# Altium PCB ACDC.PcbDoc (part 1 of 2)
Units mil, origin at the board's own origin, x right, y up, seen from the top; angles counter-clockwise.
Board outline 4750 x 3250 mil, 4 copper layers (Top Layer, Layer 1, Layer 2, Bottom Layer), stack 23.756 mil thick; 82 components, 68 nets, 464 pads, 343 vias.
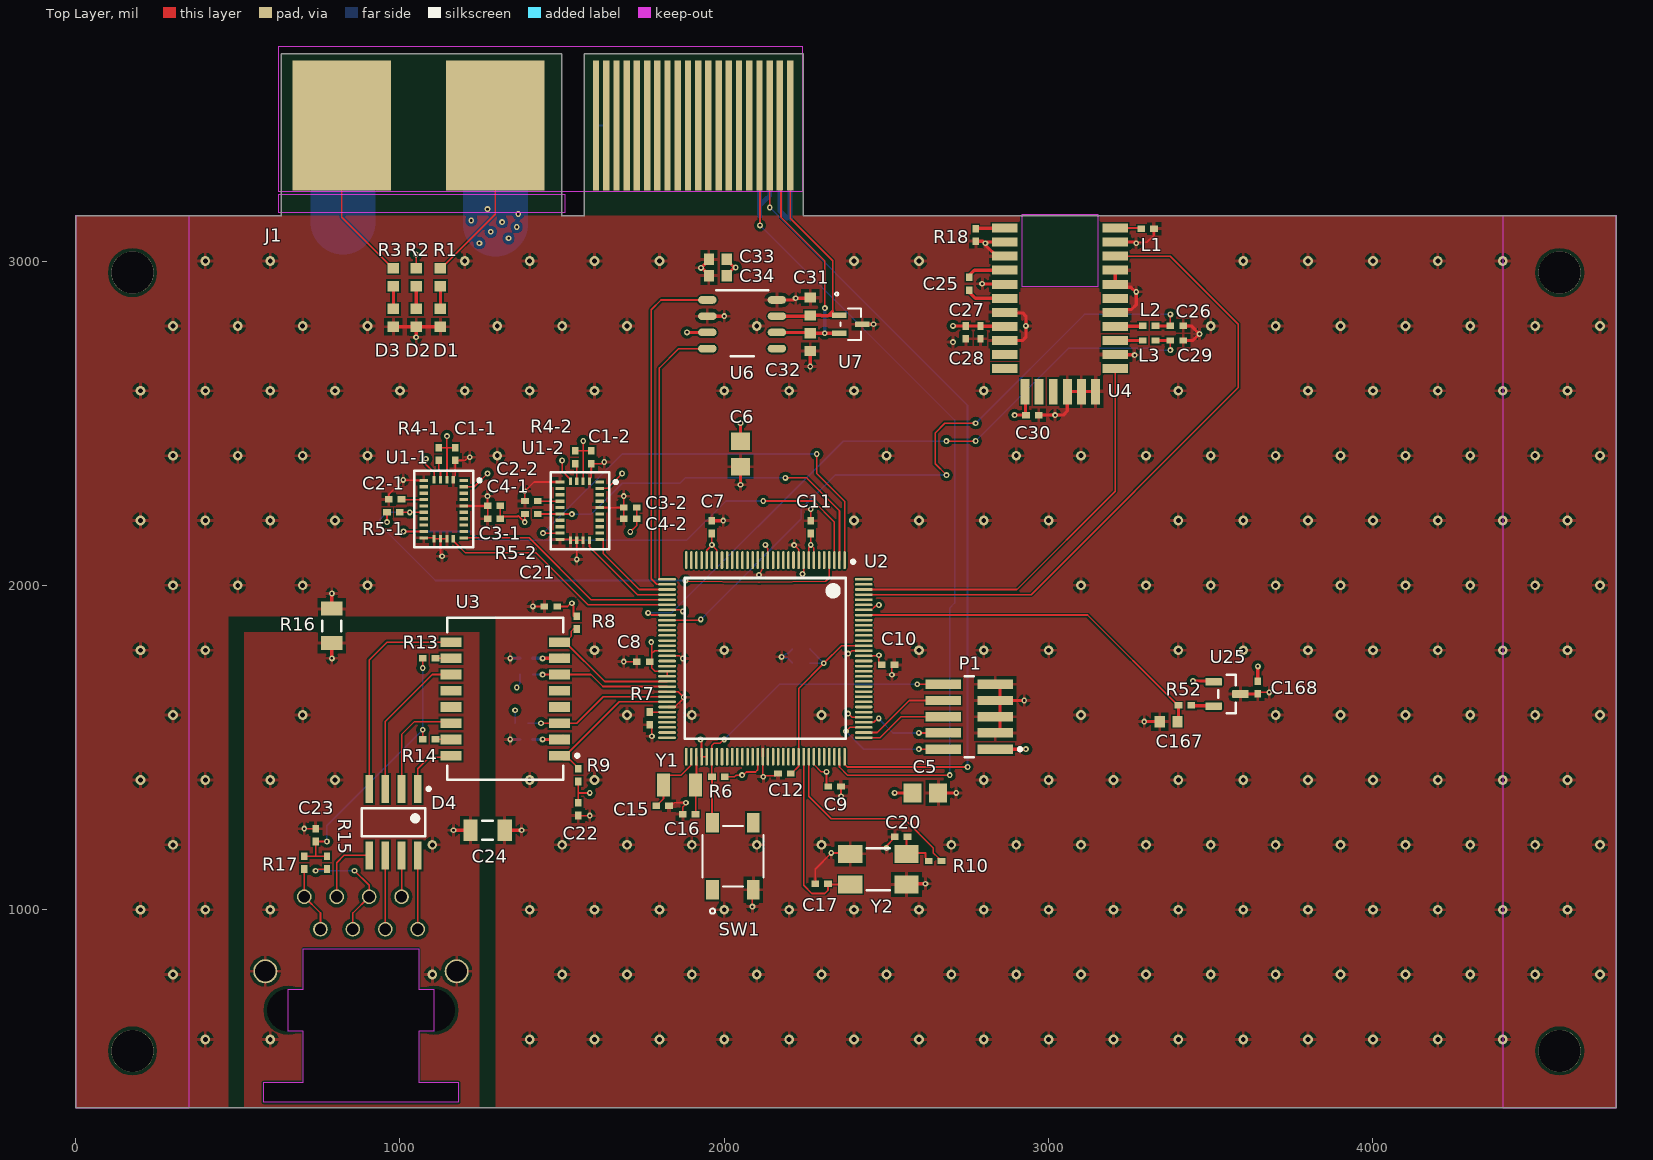
[diagram p0: Top Layer view]
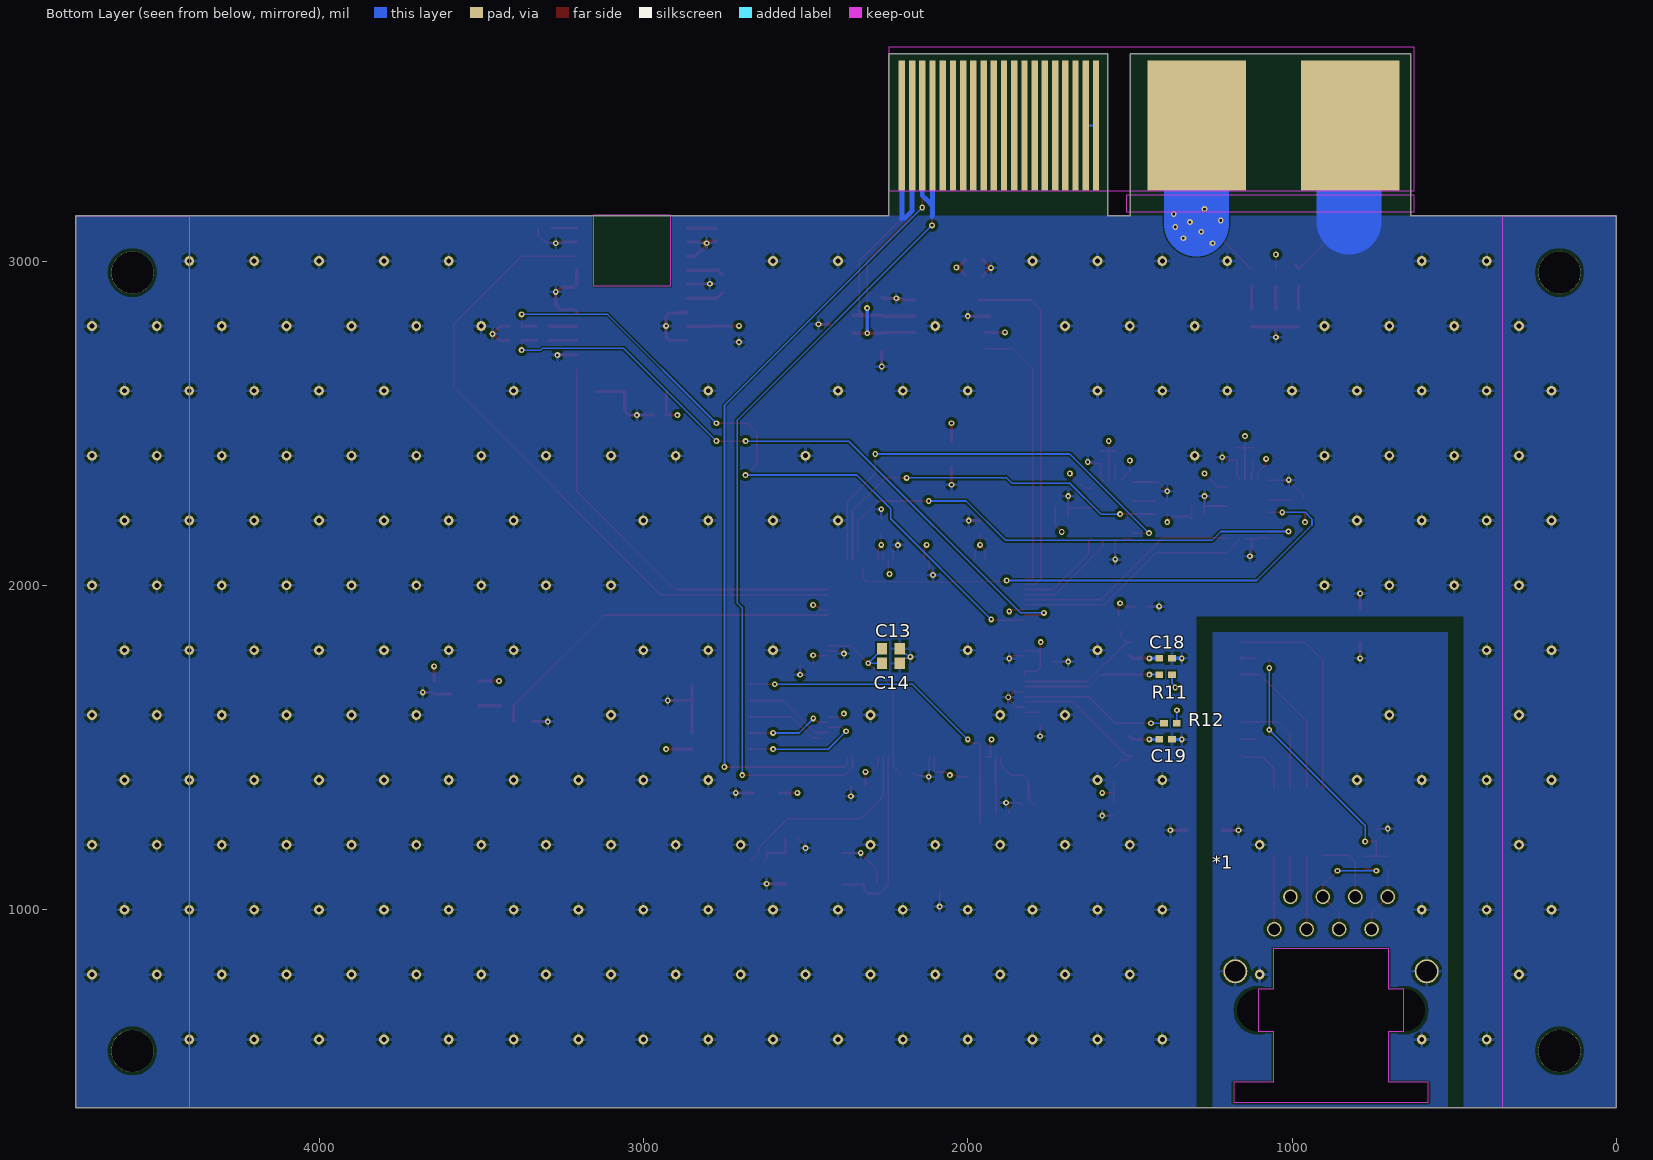
[diagram p1: Bottom Layer view, seen from below]
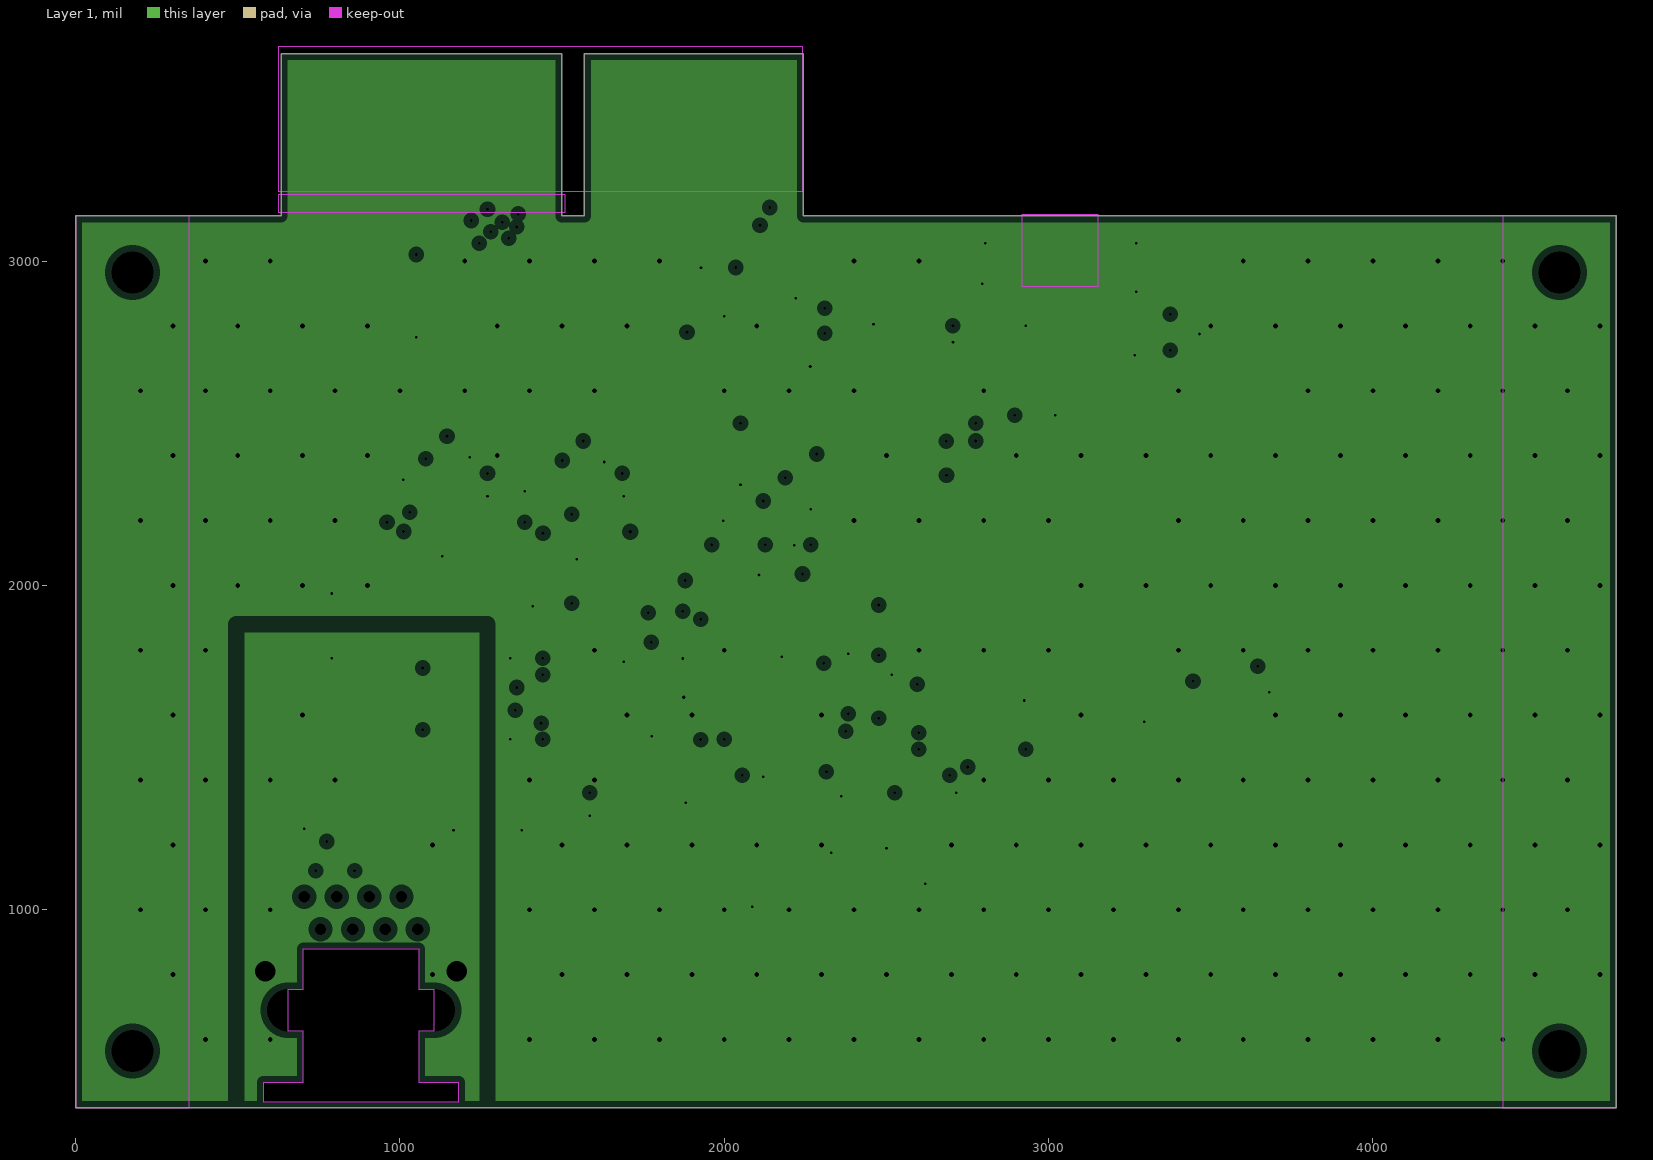
[diagram p2: Layer 1, clearances drawn from the general rule]
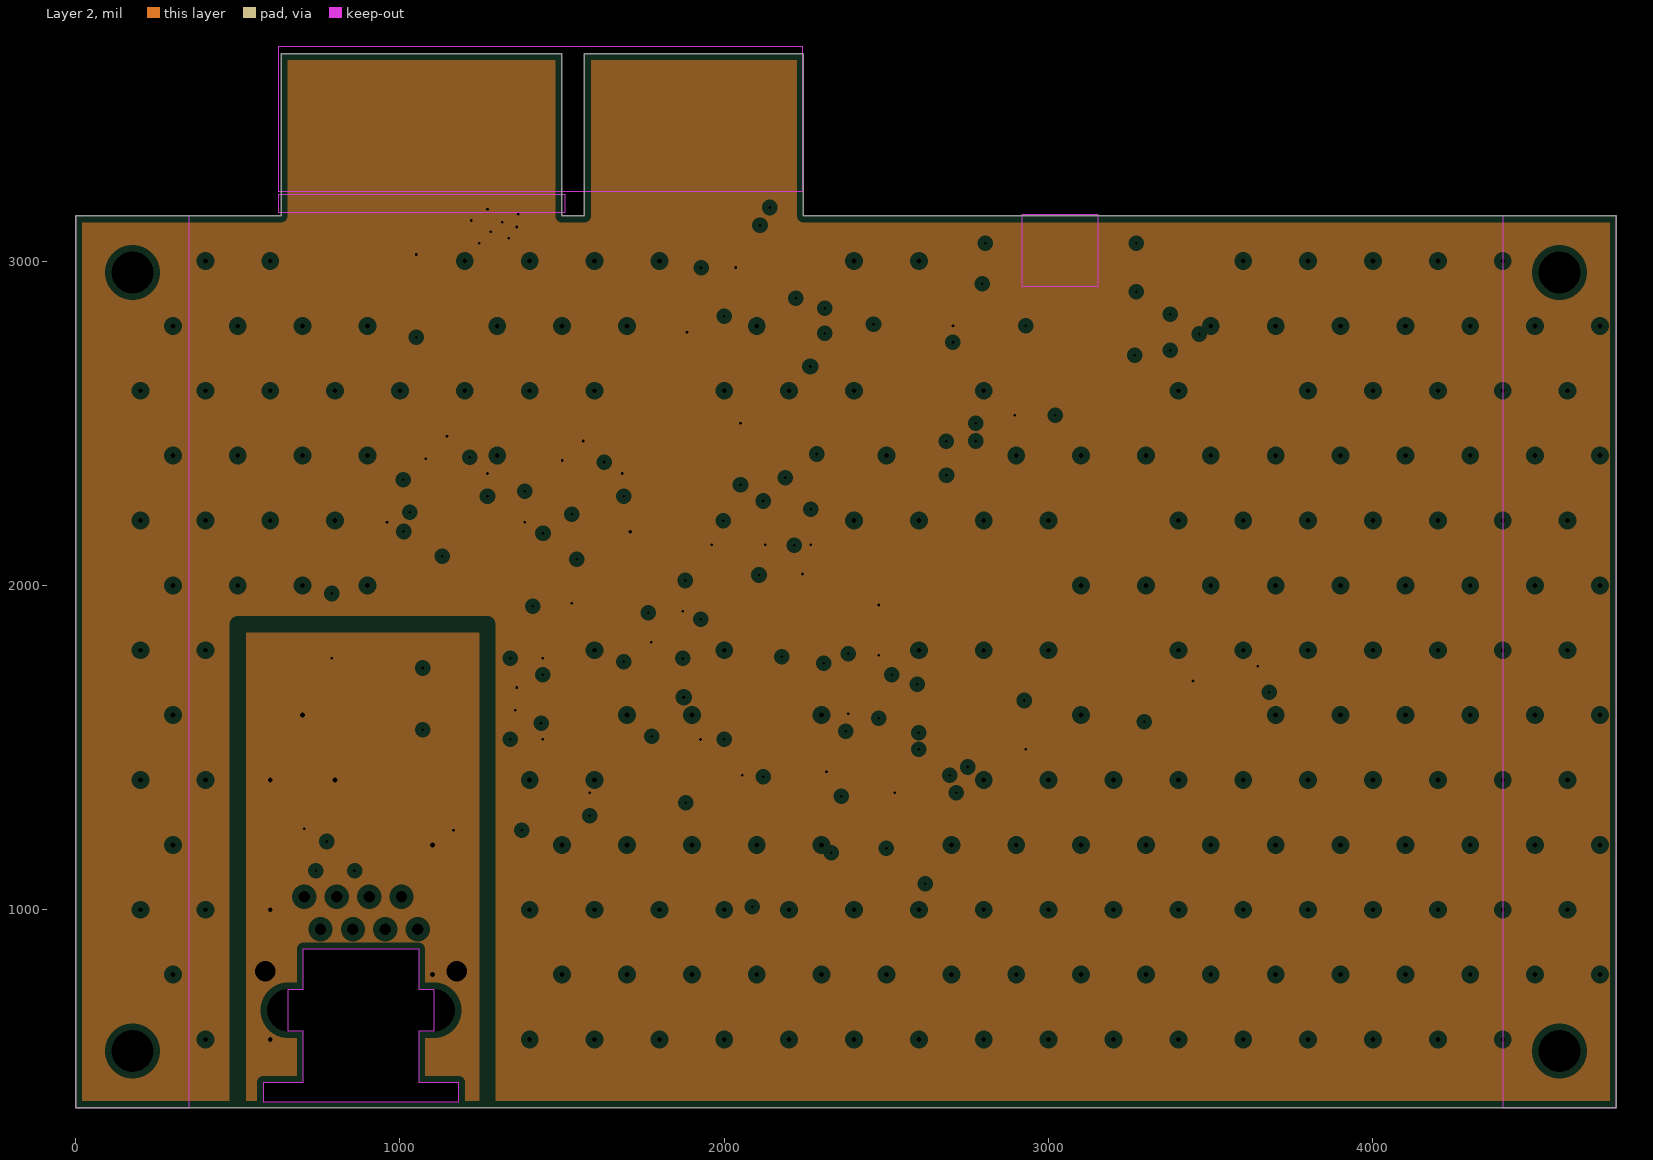
[diagram p3: Layer 2, clearances drawn from the general rule]

## Layer stack, top to bottom
Top Solder: solder mask 0.4, Solder Resist, Dk 3.5
Top Layer: signal copper 1.4
Dielectric 2: prepreg 2.8, PP-006, Dk 4.1
Layer 1: plane copper 1.378, net GND
Dielectric 1: dielectric 12.6, FR-4, Dk 4.8
Layer 2: plane copper 1.378, net 3V3
Dielectric 3: prepreg 2.8, PP-006, Dk 4.1
Bottom Layer: signal copper 1.4
Bottom Solder: solder mask 0.4, Solder Resist, Dk 3.5

## Board outline
0.5,389.5 0.5,3139.5 633.87,3139.5 633.87,3639.5 1498.87,3639.5 1498.87,3139.5 1568.87,3139.5 1568.87,3639.5 2243.86,3639.5 2243.86,3139.5 4750.5,3139.5 4750.5,389.5

## Design rules (kind name [scope] priority, off if disabled: settings)
Clearance [All] p1: gap=5 ignorepadtopadclearanceinfootprint=FALSE except(0: Arc-Text Arc-Hole Track-Text Track-Hole SMDPad-Hole THPad-Hole Via-Text Via-Hole Fill-Text Fill-Hole Poly-Text Poly-Hole Region-Text Region-Hole Text-Hole; 6: SMDPad-Text THPad-Text Text-Text; 10: Arc-Via Track-Via SMDPad-Via THPad-Via THPad-Fill THPad-Poly THPad-Region Via-Via Via-Fill Via-Poly Via-Region)
DiffPairsRouting [All] p1: maxlimit=10 minlimit=10 mostfreqgap=10 substack1={5B3CBE88-527F-45CC-934D-B3D730501180} toplayer_{5b3cbe88-527f-45cc-934d-b3d730501180}_minwidth=15 toplayer_{5b3cbe88-527f-45cc-934d-b3d730501180}_maxwidth=15 toplayer_{5b3cbe88-527f-45cc-934d-b3d730501180}_prefwidth=15 bottomlayer_{5b3cbe88-527f-45cc-934d-b3d730501180}_minwidth=15 bottomlayer_{5b3cbe88-527f-45cc-934d-b3d730501180}_maxwidth=15 bottomlayer_{5b3cbe88-527f-45cc-934d-b3d730501180}_prefwidth=15 toplayer_minwidth=15 toplayer_maxwidth=15 toplayer_prefwidth=15 bottomlayer_minwidth=15 bottomlayer_maxwidth=15 bottomlayer_prefwidth=15 substack2={8099F0E5-E8A4-4C0B-B981-DA392BF8B1DC} toplayer_{8099f0e5-e8a4-4c0b-b981-da392bf8b1dc}_minwidth=15 toplayer_{8099f0e5-e8a4-4c0b-b981-da392bf8b1dc}_maxwidth=15 toplayer_{8099f0e5-e8a4-4c0b-b981-da392bf8b1dc}_prefwidth=15 bottomlayer_{8099f0e5-e8a4-4c0b-b981-da392bf8b1dc}_minwidth=15 bottomlayer_{8099f0e5-e8a4-4c0b-b981-da392bf8b1dc}_maxwidth=15 bottomlayer_{8099f0e5-e8a4-4c0b-b981-da392bf8b1dc}_prefwidth=15 substack3={670BDCB0-0926-4304-8001-FDB9BD357462} toplayer_{670bdcb0-0926-4304-8001-fdb9bd357462}_minwidth=15 toplayer_{670bdcb0-0926-4304-8001-fdb9bd357462}_maxwidth=15 toplayer_{670bdcb0-0926-4304-8001-fdb9bd357462}_prefwidth=15 bottomlayer_{670bdcb0-0926-4304-8001-fdb9bd357462}_minwidth=15 bottomlayer_{670bdcb0-0926-4304-8001-fdb9bd357462}_maxwidth=15 bottomlayer_{670bdcb0-0926-4304-8001-fdb9bd357462}_prefwidth=15 substack4={A201DB0F-6F31-4885-A301-8523EAE111D3} toplayer_{a201db0f-6f31-4885-a301-8523eae111d3}_minwidth=15 toplayer_{a201db0f-6f31-4885-a301-8523eae111d3}_maxwidth=15 toplayer_{a201db0f-6f31-4885-a301-8523eae111d3}_prefwidth=15 bottomlayer_{a201db0f-6f31-4885-a301-8523eae111d3}_minwidth=15 bottomlayer_{a201db0f-6f31-4885-a301-8523eae111d3}_maxwidth=15 bottomlayer_{a201db0f-6f31-4885-a301-8523eae111d3}_prefwidth=15 maxuncoupledlength=500
HoleSize [All] p1: absolutevalues=TRUE maxlimit=200 minlimit=1 maxpercent=80.000 minpercent=20.000
PlaneClearance [All] p1: clearance=20
PlaneConnect [All] p1: planeconnectstyle=Direct reliefexpansion=20 reliefentries=4 reliefconductorwidth=10 reliefairgap=10
PolygonConnect [All] p1: connectstyle=Relief reliefconductorwidth=10 reliefentries=4 polygonreliefangle="90 Angle" airgapwidth=10
RoutingVias [All] p1: holewidth=28 width=50 viastyle="Through Hole" minholewidth=28 minwidth=50 maxholewidth=28 maxwidth=50
SolderMaskExpansion SolderMaskExpansion_1 [IsVia] p1: expansion=4 istentingtop=TRUE
SolderMaskExpansion [All] p2: expansion=2 istentingtop=FALSE
Width [All] p1: maxlimit=201 minlimit=5 preferedwidth=5 substack1={5B3CBE88-527F-45CC-934D-B3D730501180} toplayer_{5b3cbe88-527f-45cc-934d-b3d730501180}_maxwidth=10 bottomlayer_{5b3cbe88-527f-45cc-934d-b3d730501180}_maxwidth=10 substack2={8099F0E5-E8A4-4C0B-B981-DA392BF8B1DC} toplayer_{8099f0e5-e8a4-4c0b-b981-da392bf8b1dc}_maxwidth=10 bottomlayer_{8099f0e5-e8a4-4c0b-b981-da392bf8b1dc}_maxwidth=10 substack3={670BDCB0-0926-4304-8001-FDB9BD357462} toplayer_{670bdcb0-0926-4304-8001-fdb9bd357462}_maxwidth=10 bottomlayer_{670bdcb0-0926-4304-8001-fdb9bd357462}_maxwidth=10 substack4={A201DB0F-6F31-4885-A301-8523EAE111D3} toplayer_{a201db0f-6f31-4885-a301-8523eae111d3}_maxwidth=10 bottomlayer_{a201db0f-6f31-4885-a301-8523eae111d3}_maxwidth=10 minimp=50.000000 maximp=50.000000 favimp=50.000000
26 further rules are at their usual default settings.

## Classes and differential pairs
channel class BNO055: U_BNO0551 U_BNO0552
component class U_BNO0552: C1-2 C2-2 C3-2 C4-2 R4-2 R5-2 U1-2
component class U_BNO0551: C1-1 C2-1 C3-1 C4-1 R4-1 R5-1 U1-1
component class Designator: *1 C5 C6 C7 C8 C9 C10 C11 C12 C13 C14 C15 C16 C17 C18 C19 C20 C21 C22 C23 C24 D4 P1 R6 R7 R8 R9 R10 R11 R12 R13 R14 R15 R16 R17 SW1 U2 U3 Y1 Y2

## Components (designator, comment, footprint, x,y, rotation, side; value= is the part's Value field where it differs from the comment)
*1 "RJULE4218201" RJULE4218201 880,690 r180 bottom
C1-1 "Cap" 0402-A 1170,2405 r90 top value=100nF (schematic designator C1)
C1-2 "Cap" 0402-A 1590,2395 r90 top value=100nF (schematic designator C1)
C2-1 "Cap" 0402-A 985,2265 r0 top value=100nF (schematic designator C2)
C2-2 "Cap" 0402-A 1405,2260 r0 top value=100nF (schematic designator C2)
C3-1 "Cap" 0402-A 1290,2205 r0 top value=100nF (schematic designator C3)
C3-2 "Cap" 0402-A 1710,2240 r0 top value=100nF (schematic designator C3)
C4-1 "Cap" 0402-A 1290,2245 r0 top value=6.8nF (schematic designator C4)
C4-2 "Cap" 0402-A 1710,2205 r0 top value=6.8nF (schematic designator C4)
C5 "Cap" 6-0805_M 2620,1360 r0 top value=10uF
C6 "Cap" 6-0805_M 2050,2405 r270 top value=4.7uF
C7 "Cap" 0402-A 1961.77,2179.65 r270 top value=100nF
C8 "Cap" 0402-A 1750,1765 r0 top value=100nF
C9 "Cap" 0402-A 2340,1380 r180 top value=100nF
C10 "Cap" 0402-A 2505,1755 r180 top value=100nF
C11 "Cap" 0402-A 2266.77,2179.65 r270 top value=10nF
C12 "Cap" 0402-A 2185.32,1420 r0 top value=100nF
C13 "Cap" 1608[0603] 2236.77,1804.65 r0 bottom value=1uF
C14 "Cap" 1608[0603] 2236.77,1759.65 r0 bottom value=2.2uF
C15 "Cap" 0402-A 1810,1320 r180 top value=12pF
C16 "Cap" 0402-A 1891.77,1294.65 r0 top value=12pF
C17 "Cap" 0402-A 2300,1080 r0 top value=12pF
C18 "Cap" 0402-A 1390,1775 r180 bottom value=100nF
C19 "Cap" 0402-A 1390,1525 r180 bottom value=100nF
C20 "Cap" 0402-A 2545,1225 r0 top value=12pF
C21 "Cap" 0402-A 1465,1935 r180 top value=100nF
C22 "Cap" 0402-A 1550,1310 r270 top value=100nF
C23 "Cap" 0402-A 740,1230 r270 top value=10nF
C24 "Cap" C1206 1270,1245 r0 top value=4.7nF
C25 "Cap" 0402-A 2755,2930 r90 top value=22pF
C26 "Cap" 0402-A 3395,2800 r180 top value=22pF
C27 "Cap" 0402-A 2745,2780 r90 top value=22pF
C28 "Cap" 0402-A 2790,2780 r90 top value=2.2uF
C29 "Cap" 0402-A 3395,2755 r180 top value=22pF
C30 "Cap" 0402-A 2950,2525 r180 top value=22pF
C31 "Cap" 1608[0603] 2265,2860 r270 top value=100nF
C32 "Cap" 1608[0603] 2265,2750 r90 top value=100nF
C33 "Cap" 1608[0603] 1980,3005 r180 top value=100nF
C34 "Cap" 1608[0603] 1980,2955 r0 top value=1nF
C167 "Cap" 1608[0603] 3370,1580 r180 top value=680pF
C168 "Cap" 0402-A 3645,1685 r270 top value=100nF
D1 "LED0" 1608[0603] 1125,2825 r270 top
D2 "LED0" 1608[0603] 1050,2825 r270 top
D3 "LED0" 1608[0603] 980,2825 r270 top
D4 "SLVU2.8-4.TBT" SEMT-SO-8_V 980,1270 r270 top
J1 "HSEC8-120-01-L-PV-4-1" "HSEC8-120-01-L-PV-4-1 Gold Fingers" 1450,3435 r0 top
L1 "Inductor" 0402-A 3305,3100 r0 top value=1.8nH
L2 "Inductor" 0402-A 3310,2800 r0 top value=47nH
L3 "Inductor" 0402-A 3310,2755 r0 top value=47nH
P1 "FTSH-105-01-L-DV-K" SMTC-FTSH-105-01-L-DV-K_V 2755,1595 r90 top
R1 "Res1" 1608[0603] 1125,2950 r90 top value=470
R2 "Res1" 1608[0603] 1050,2950 r90 top value=470
R3 "Res1" 1608[0603] 980,2950 r90 top value=470
R4-1 "Res1" 0402-A 1120,2405 r270 top value=10k (schematic designator R4)
R4-2 "Res1" 0402-A 1540,2395 r270 top value=10k (schematic designator R4)
R5-1 "Res1" 0402-A 980,2225 r180 top value=10k (schematic designator R5)
R5-2 "Res1" 0402-A 1405,2220 r180 top value=10k (schematic designator R5)
R6 "Res1" 0402-A 1981.77,1409.65 r180 top value=10k
R7 "Res1" 0402-A 1770,1590 r90 top value=4.87k
R8 "Res1" 0402-A 1545,1885 r270 top value=50
R9 "Res1" 0402-A 1550,1415 r90 top value=50
R10 "Res1" 0402-A 2650,1150 r180 top value=2k
R11 "Res1" 0402-A 1389.84,1725 r0 bottom value=50
R12 "Res1" 0402-A 1375,1575 r0 bottom value=50
R13 "Res1" 0402-A 1090,1775 r0 top value=75
R14 "Res1" 0402-A 1090,1525 r0 top value=75
R15 "Res1" 0402-A 775,1145 r270 top value=75
R16 "Res1" C1206 790,1875 r90 top value=1M
R17 "Res1" 0402-A 705,1145 r270 top value=75
R18 "Res1" 0402-A 2775,3080.31 r90 top value=0
R52 "Res1" 0402-A 3420,1630 r180 top value=0
SW1 "PTS647SK38SMTR2LFS" PTS647SK38SMTR2LFS_CNK 2026.77,1164.65 r90 top
U1-1 "BNO055" FP-BNO055-MFG 1135,2235 r0 top (schematic designator U1)
U1-2 "BNO055" FP-BNO055-MFG 1555,2230 r0 top (schematic designator U1)
U2 "MSP432E401YTPDT" PDT0128A 2126.77,1774.65 r270 top value=Value
U3 "HX1188FNL" PULS-HX1188FNL-SMT-16_V 1325,1650 r90 top
U4 "M20048-1" M20048-1 2927.6,2597.52 r0 top
U6 "TCAN334DR" D0008A_N 2055,2805 r0 top value=Value
U7 "D5V0L2B3W-7" SOT-323_DIO 2390,2805 r270 top
U25 "TMP235AQDBZTQ1" FP-DBZ0003A-MFG 3550,1665 r0 top
Y1 "XTAL" "FC-135 32.7680KA-AC0" 1861.77,1384.65 r180 top
Y2 "ABM3B-25.000MHZ-10-1-U-T" OSCCC500X320X110-4N 2475,1125 r180 top

## Footprints (in the part's own frame and the unit in brackets; to place one, negate y for a bottom-side part, rotate by r counter-clockwise, add the part's x,y. Pads: shape width x height; smd on the part's side, far side on the other; paste and mask are expansions set on the pad)
6-0805_M [mm] "Chip Resistor, Body 2.0x1.2mm, IPC Low Density"
  rect 1.4x1.5 smd: 1(-1,0) 2(1,0)
  body extent -1.07,-0.7 1.07,0.7, height 0.7
0402-A [mm] "Chip Inductor, Body 1.0x0.5mm, IPC High Density"
  rect 0.6x0.5 smd: 1(-0.5,0) 2(0.5,0)
  body extent -0.55,-0.3 0.55,0.3, height 0.55
1608[0603] [mm] "Chip Capacitor, Body 1.6x0.8mm, IPC High Density"
  rect 0.8x0.9 smd: 1(-0.7,0) 2(0.7,0)
  body extent -0.87,-0.48 0.87,0.48, height 1.3
C1206 [mm] "Chip Capacitor, Body 3.2x1.6mm, IPC High Density"
  rect 1.1x1.7 smd: 1(-1.35,0) 2(1.35,0)
  silkscreen extent -0.4,-0.75 0.4,0.75, body extent -1.7,-0.9 1.7,0.9, height 1.3
D0008A_N [mm]
  oval 1.45x0.6 smd paste+0 mask+0.051: 1(-2.725,1.905) 2(-2.725,0.635) 3(-2.725,-0.635) 4(-2.725,-1.905) 5(2.725,-1.905) 6(2.725,-0.635) 7(2.725,0.635) 8(2.725,1.905)
  silkscreen extent -2.04,-2.5 2.03,2.67, body extent 0,0 0.25,0.25, height 0.25
"FC-135 32.7680KA-AC0" [mm]
  rect 1x1.8 smd: 1(-1.25,0) 2(1.25,0)
FP-BNO055-MFG [mm]
  rect 0.675x0.25 smd paste+0 mask+0: 1(1.562,2.25) 6(-1.562,2.25) 7(-1.562,1.75) 8(-1.562,1.25) 9(-1.562,0.75) 10(-1.562,0.25) 11(-1.562,-0.25) 12(-1.562,-0.75) 13(-1.562,-1.25) 14(-1.562,-1.75) 15(-1.562,-2.25) 20(1.562,-2.25) 21(1.562,-1.75) 22(1.562,-1.25) 23(1.562,-0.75) 24(1.562,-0.25) 25(1.562,0.25) 26(1.562,0.75) 27(1.562,1.25) 28(1.562,1.75)
  rect 0.25x0.575 smd paste+0 mask+0: 2(0.75,2.312) 3(0.25,2.312) 4(-0.25,2.312) 5(-0.75,2.312) 16(-0.75,-2.312) 17(-0.25,-2.312) 18(0.25,-2.312) 19(0.75,-2.312)
  silkscreen extent -2.3,-3 2.93,3
FP-DBZ0003A-MFG [mm]
  rrect17% 1.3x0.6 smd paste+0 mask+0: 1(-1.05,0.95) 2(-1.05,-0.95) 3(1.05,0)
  silkscreen extent -0.7,-1.52 0.7,1.52, body extent -1.8,-1.62 1.8,1.62, height 0.25
"HSEC8-120-01-L-PV-4-1 Gold Fingers" [mil]
  rect 303x400 smd paste-400: 0(-629,-17.25) 1(-156,-17.25)
  rect 19.68x400 smd paste-400: 2(154.5,-17.25) 3(186,-17.25) 4(217.5,-17.25) 5(249,-17.25) 6(280.5,-17.25) 7(312,-17.25) 8(343.5,-17.25) 9(375,-17.25) 10(406.5,-17.25) 11(438,-17.25) 12(469.5,-17.25) 13(501,-17.25) 14(532.5,-17.25) 15(564,-17.25) 16(595.5,-17.25) 17(627,-17.25) 18(658.5,-17.25) 19(690,-17.25) 20(721.5,-17.25) 21(753,-17.25)
  rect 303x400 smd far side paste-400: 22(-629,-17.25) 23(-156,-17.25)
  rect 19.68x400 smd far side paste-400: 24(154.5,-17.25) 25(186,-17.25) 26(217.5,-17.25) 27(249,-17.25) 28(280.5,-17.25) 29(312,-17.25) 30(343.5,-17.25) 31(375,-17.25) 32(406.5,-17.25) 33(438,-17.25) 34(469.5,-17.25) 35(501,-17.25) 36(532.5,-17.25) 37(564,-17.25) 38(595.5,-17.25) 39(627,-17.25) 40(658.5,-17.25) 41(690,-17.25) 42(721.5,-17.25) 43(753,-17.25)
  Keep-Out Layer region: -825,-220 792.61,-220 792.61,225 -825,225
  Keep-Out Layer region: -825,-285 60,-285 60,-230 -825,-230
M20048-1 [mm]
  rect 2x0.7 smd: 1(-1.59,12.806) 2(-1.59,11.704) 3(-1.59,10.604) 4(-1.59,9.504) 5(-1.59,8.4) 6(-1.59,7.302) 7(-1.59,6.202) 8(-1.59,5.1) 9(-1.59,4) 10(-1.59,2.9) 11(-1.59,1.8) 18(7.05,1.8) 19(7.05,2.9) 20(7.05,4) 21(7.05,5.1) 22(7.05,6.202) 23(7.05,7.302) 24(7.05,8.4) 25(7.05,9.504) 26(7.05,10.604) 27(7.05,11.704) 28(7.05,12.806)
  rect 0.7x2 smd: 12(0,0) 13(1.1,0) 14(2.2,0) 15(3.3,0) 16(4.4,0) 17(5.5,0)
  Keep-Out Layer region: -0.285,8.255 5.715,8.255 5.715,13.843 -0.285,13.843
OSCCC500X320X110-4N [mm]
  rect 1.9x1.4 smd: 1(-2.2,-1.2) 2(2.2,-1.2) 3(2.2,1.2) 4(-2.2,1.2)
  silkscreen extent -0.89,-1.65 0.89,1.65
PDT0128A [mm]
  oval 1.4x0.2 smd paste+0 mask+0: 1(-7.7,6.2) 2(-7.7,5.8) 3(-7.7,5.4) 4(-7.7,5) 5(-7.7,4.6) 6(-7.7,4.2) 7(-7.7,3.8) 8(-7.7,3.4) 9(-7.7,3) 10(-7.7,2.6) 11(-7.7,2.2) 12(-7.7,1.8) 13(-7.7,1.4) 14(-7.7,1) 15(-7.7,0.6) 16(-7.7,0.2) 17(-7.7,-0.2) 18(-7.7,-0.6) 19(-7.7,-1) 20(-7.7,-1.4) 21(-7.7,-1.8) 22(-7.7,-2.2) 23(-7.7,-2.6) 24(-7.7,-3) 25(-7.7,-3.4) 26(-7.7,-3.8) 27(-7.7,-4.2) 28(-7.7,-4.6) 29(-7.7,-5) 30(-7.7,-5.4) 31(-7.7,-5.8) 32(-7.7,-6.2) 65(7.7,-6.2) 66(7.7,-5.8) 67(7.7,-5.4) 68(7.7,-5) 69(7.7,-4.6) 70(7.7,-4.2) 71(7.7,-3.8) 72(7.7,-3.4) 73(7.7,-3) 74(7.7,-2.6) 75(7.7,-2.2) 76(7.7,-1.8) 77(7.7,-1.4) 78(7.7,-1) 79(7.7,-0.6) 80(7.7,-0.2) 81(7.7,0.2) 82(7.7,0.6) 83(7.7,1) 84(7.7,1.4) 85(7.7,1.8) 86(7.7,2.2) 87(7.7,2.6) 88(7.7,3) 89(7.7,3.4) 90(7.7,3.8) 91(7.7,4.2) 92(7.7,4.6) 93(7.7,5) 94(7.7,5.4) 95(7.7,5.8) 96(7.7,6.2)
  oval 0.2x1.4 smd paste+0 mask+0: 33(-6.2,-7.7) 34(-5.8,-7.7) 35(-5.4,-7.7) 36(-5,-7.7) 37(-4.6,-7.7) 38(-4.2,-7.7) 39(-3.8,-7.7) 40(-3.4,-7.7) 41(-3,-7.7) 42(-2.6,-7.7) 43(-2.2,-7.7) 44(-1.8,-7.7) 45(-1.4,-7.7) 46(-1,-7.7) 47(-0.6,-7.7) 48(-0.2,-7.7) 49(0.2,-7.7) 50(0.6,-7.7) 51(1,-7.7) 52(1.4,-7.7) 53(1.8,-7.7) 54(2.2,-7.7) 55(2.6,-7.7) 56(3,-7.7) 57(3.4,-7.7) 58(3.8,-7.7) 59(4.2,-7.7) 60(4.6,-7.7) 61(5,-7.7) 62(5.4,-7.7) 63(5.8,-7.7) 64(6.2,-7.7) 97(6.2,7.7) 98(5.8,7.7) 99(5.4,7.7) 100(5,7.7) 101(4.6,7.7) 102(4.2,7.7) 103(3.8,7.7) 104(3.4,7.7) 105(3,7.7) 106(2.6,7.7) 107(2.2,7.7) 108(1.8,7.7) 109(1.4,7.7) 110(1,7.7) 111(0.6,7.7) 112(0.2,7.7) 113(-0.2,7.7) 114(-0.6,7.7) 115(-1,7.7) 116(-1.4,7.7) 117(-1.8,7.7) 118(-2.2,7.7) 119(-2.6,7.7) 120(-3,7.7) 121(-3.4,7.7) 122(-3.8,7.7) 123(-4.2,7.7) 124(-4.6,7.7) 125(-5,7.7) 126(-5.4,7.7) 127(-5.8,7.7) 128(-6.2,7.7)
  silkscreen extent -7.7,-6.3 6.3,7, body extent 0,0 0.25,0.25, height 0.25
PTS647SK38SMTR2LFS_CNK [mil]
  rect 61x39 smd paste+0 mask+0: 1(-103.35,62.99) 2(103.35,62.99) 3(-103.35,-62.99) 4(103.35,-62.99)
  silkscreen extent -177,-94 94,94, body extent 0,0 10,10, height 10
PULS-HX1188FNL-SMT-16_V [mm] "SMD, 16-Leads, Body 12.7x9.09mm, Pitch 1.27mm"
  rect 0.76x1.65 smd: 1(-4.445,-4.255) 2(-3.175,-4.255) 3(-1.905,-4.255) 4(-0.635,-4.255) 5(0.635,-4.255) 6(1.905,-4.255) 7(3.175,-4.255) 8(4.445,-4.255) 9(4.445,4.255) 10(3.175,4.255) 11(1.905,4.255) 12(0.635,4.255) 13(-0.635,4.255) 14(-1.905,4.255) 15(-3.175,4.255) 16(-4.445,4.255)
  silkscreen extent -6.35,-5.75 6.35,4.54, body extent -6.35,-4.54 6.35,4.54, height 5.99
RJULE4218201 [mil]
  round 45 hole 35: 1(-175,250) 2(-125,350) 3(-75,250) 4(-25,350) 5(25,250) 6(75,350) 7(125,250) 8(175,350)
  round 74 hole 64: 9(-295,120) 10(295,120)
  round 74 hole 130 unplated: 11(-225,0) 11(225,0)
  Keep-Out Layer board cut-out: -177.5,189 -177.5,65 -225,65 -225,-65 -177.5,-65 -177.5,-222 -300.5,-222 -300.5,-284 300.5,-284 300.5,-222 177.5,-222 177.5,-65 225,-65 225,65 177.5,65 177.5,189
  body extent -372,-348 372,410, height 376
SEMT-SO-8_V [mm] "SOIC, 8-Leads, Body 5x4mm, Pitch 1.27mm"
  rect 2.2x0.6 smd: 1(-2.6,1.905) 2(-2.6,0.635) 3(-2.6,-0.635) 4(-2.6,-1.905) 5(2.6,-1.905) 6(2.6,-0.635) 7(2.6,0.635) 8(2.6,1.905)
  silkscreen extent -2.72,-2.5 1.1,2.88, body extent -3,-2.5 3,2.5, height 1.75
SMTC-FTSH-105-01-L-DV-K_V [mm] "CONN, 10-Leads, Body 6.35x3.43mm, Pitch 1.27mm"
  rect 0.74x2.79 smd: 1(-2.54,-2.035) 2(-2.54,2.035) 3(-1.27,-2.035) 4(-1.27,2.035) 5(0,-2.035) 6(0,2.035) 7(1.27,-2.035) 8(1.27,2.035) 9(2.54,-2.035) 10(2.54,2.035)
  silkscreen extent -3.17,-4.11 3.17,0.34, body extent -3.17,-2.92 3.18,2.92, height 6.12
SOT-323_DIO [mm]
  rect 0.451x1.111 smd paste+0 mask+0: 1(-0.7,-0.9) 2(0.7,-0.9) 3(0,0.9)
  silkscreen extent -2.5,-1.23 1.23,0.8, body extent 0,0 0.25,0.25, height 0.25

## Part data
C1-1 C1-2 C2-1 C2-2 C3-1 C3-2 C4-1 C4-2 C5 C6 C7 C8 C9 C10 C11 C12 C13 C14 C15 C16 C17 C18 C19 C20 C21 C22 C23 C24 C25 C26 C27 C28 C29 C30 C31 C32 C33 C34 C167 C168: "Capacitor", LatestRevisionDate=17-Jul-2002, LatestRevisionNote="Re-released for DXP Platform.", PackageDescription="Radial Cap, Thru-Hole; 2 Leads; 0.3 in Pin Spacing", PackageReference=RAD-0.3, Published=8-Jun-2000, Publisher="Altium Limited"
D4: library part CMP-2000-07074-1, "EPD TVS Diode Array for ESD and Latch-Up Protection, 2.8 V VRWM, -55 to 125 degC, 8-Pin SOIC, RoHS, Tape and Reel", Clamping Voltage=15V, Leakage Current=1uA, Manufacturer=Semtech, Operating Temp Range=-55Cto125C, Operating Temperature Classification=Military, Operating Temperature Max Deg. C=125C, Operating Temperature Min Deg. C=-55C, Package / Case=SOIC, Package Description="8-Pin Small Outline Integrated Circuit, Body 4.9 x 3.9 mm, Pitch 1.27 mm", Package Reference=SO-8, Peak Pulse Current=24A, Peak Pulse Power Dissipation=400W, Reverse Stand-off Voltage=2.8V, Clamping Voltage (Max)=15V, Configuration=Dual, Datasheet URL=http://www.semtech.com/images/datasheet/slvu2.8-4.pdf, Datasheet Version=01/2008, Direction Type=Bi-Directional, Leakage Current (Max)=1uA, Manufacturer URL=http://www.semtech.com/, Mounting=SurfaceMount, Mounting Style=SurfaceMount, Mounting Technology=SurfaceMount, Number of  Elements=4, Package Type=SOIC, Packaging=TapeandReel, Pin Count=8, Polarity=Uni-Directional, Product Depth (mm)=4mm, Product Height (mm)=1.5mm, Product Length (mm)=5mm, Rad Hardened=No, Suppressor Type=TVS, Working Voltage=2.8V, Working Voltage (Max)=2.8V
P1: library part CMP-2000-05353-1, "Male Header, Pitch 1.27 mm, 2 x 5 Position, Height 6.25 mm", Color=Black, Manufacturer=Samtec, Package Description="Male Header, Pitch 1.27 mm, 2 x 5 Position, Height 5.97 mm, Tail Length 4.32 mm", Standard Package=1, Category=Connectors,Interconnects, Connector Type=Header,Unshrouded, Contact Finish=Gold, Contact Finish Thickness=10µin(0.25µm), Contact Mating Length="0.120\"(3.05mm)", Contact Type=MalePin, Datasheet URL=http://suddendocs.samtec.com/prints/ftsh-1xx-xx-xxx-dv-xxx-mkt.pdf, Datasheet Version="Rev. ET, 10/1995", Family=RectangularConnectors-Headers,MalePins, Manufacturer URL=http://www.samtec.com/, Mating Products="SFMC-105-L2-S-D-TR-ND / -CONN.05\"SURFACE10POSSMT / FLE-105-01-G-DV-TR-ND / -CONNSKT1.27MM10POSDUALSMD / FLE-105-01-G-DV-A-P-ND / -CONNSKT1.27MM10POSDUALSMD / FLE-105-01-G-DV-A-ND / -CONNSKT1.27MM10POSDUALSMD / CLP-105-02-G-D-P-TR-ND / -CONNRCPT10POSDUAL.05\"SMD / SAM1155-05-ND / -CONNRCPT10POSDUAL.05\"SMD / SAM1154-05-ND / -CONNRCPT10POSDUAL.05\"SMD / SAM1153-05-ND / -CONNRCPT10POSDUAL.05\"SMD / SAM1226-05-ND / -CONNRCPT.05\"10POSDUALSMD", Mounting Type=SurfaceMount, Number of Positions=10, Number of Positions Loaded=All, Number of Rows=2, Other Names=Q3937619, Package Reference=FTSH-105-01-L-DV-K, Package URL=http://suddendocs.samtec.com/prints/ftsh-1xx-xx-xxx-dv-xxx-footprint.pdf, Packaging=Tube, Pitch="0.050\"(1.27mm)", Product Training Modules=Board-to-BoardConnectors, Row Spacing="0.050\"(1.27mm)", Series=FTSH, Termination=Solder
R1 R2 R3 R4-1 R4-2 R5-1 R5-2 R6 R7 R8 R9 R10 R11 R12 R13 R14 R15 R16 R17 R18 R52: "Resistor", LatestRevisionDate=17-Jul-2002, LatestRevisionNote="Re-released for DXP Platform.", PackageDescription="Axial Device, Thru-Hole; 2 Leads; 0.3 in Pin Spacing", PackageReference=AXIAL-0.3, Published=8-Jun-2000, Publisher="Altium Limited"
SW1 U7: "No Description Available", Copyright="Copyright (C) 2018 Accelerated Designs. All rights reserved", RefDes=RefDes, Type=DEV
  SW1: Built_By=EMA_Cory, Datasheet=https://www.ckswitches.com/media/2567/pts647.pdf, Manufacturer_Part_Number=PTS647SK38SMTR2LFS, SourceLibrary=C&K_2020-05-06, Vendor=C&K
  U7: Built_By=EMA_UL_Team, Manufacturer_Part_Number=D5V0L2B3W-7, SourceLibrary=DIODESINC_2_2015-08-18, Vendor="Diodes Inc"
U1-1 U1-2: library part CMP-191067-000002-1, "IMU ACCEL/GYRO/MAG I2C 28LGA", Ambient Temperature Range High=+85°C, Ambient Temperature Range Low=-40°C, Manufacturer="Bosch Sensortech", Max Supply Voltage=3.6V, Min Supply Voltage=1.7V, Operating Supply Current=12.3mA, Package=0, Temperature="-40°C to +85°C", Voltage=1.7~3.6V, Accel Range=2/4/8/16g, Accel Resolution=14bits, Accel Sensitivity=0.001LSB/g, Automotive=No, Category=IC, ComponentLink2Description=Datasheet, ComponentLink2URL=https://ae-bst.resource.bosch.com/media/_tech/media/datasheets/BST-BNO055-DS000.pdf, Device Class L1=Sensors, Device Class L2="Motion Sensors", Device Class L3="Inertial Measurement Units (IMUs)", Digikey Description="IMU ACCEL/GYRO/MAG I2C 28LGA", Gyro Range=125/250/500/1000/2000°/s, Gyro Sensitivity=16LSB/°/s, Height=1.18mm, Lead Free=Yes, Mag Sense Range=1300-2500uT, Manufacturer Part Number=BNO055, Mouser Description="BNO055 Series 1.7 to 3.6 V Intelligent 9-Axis Absolute Orientation Sensor-LGA-28", Octopart=https://octopart.com/bno055-bosch+sensortec-50309911, RoHS=TRUE, Sensor Output=I2C,UART, Sensor Type=Accelerometer,Gyroscope,Magnetometer, Temperature Range High=+85°C, Temperature Range Low=-40°C
U2: "No Description Available", Manufacturer="Texas Instruments", PartNumber=MSP432E401YTPDTR, Copyright="Copyright (C) 2018 Accelerated Designs. All rights reserved", RefDes=RefDes, Type=DEV
U3: library part CMP-2000-06431-1, "Telecom Transformer 1:1/1:1, -40 to 85 degC, 16-Pin SMT, RoHS, Tube", Manufacturer="Pulse Electronics", Package Description="16-Pin Surface Mount Device, Body 12.7 x 9.09 mm, Pitch 1.27 mm", Package Reference=SMT, Standard Package=40, Category=Transformers, Datasheet URL=http://productfinder.pulseeng.com/products/datasheets/HX1188FNL.pdf;jsessionid=D0CB5525A348FF42F5E5BE320CB10324, Datasheet Version="Rev. B, 05/2014", Family=PulseTransformers, Height - Seated (Max)=5.99mm, Manufacturer URL=http://www.pulseelectronics.com/, Mounting Technology=SurfaceMount, Mounting Type=SurfaceMount, Online Catalog=HX1188, Other Names=553-2200, Other Related Documents=PackagesFNLvs.NL, PartNumber=HX1188FNL, Size / Dimension=12.70mmLx9.00mmW, Transformer Type=IsolationandDataInterface(Encapsulated), Turns Ratio - Primary=Secondary:1:1Transmitter,1:1Receiver
U6: "No Description Available", Manufacturer="Texas Instruments", Copyright="Copyright (C) 2018 Accelerated Designs. All rights reserved", PartNumber=TCAN334DR, RefDes=RefDes, Type=DEV
U25: library part CMP-04948-000003-1, "LOW-POWER HIGH-ACCURACY ANALOG O", Ambient Temperature Range High=+150°C, Ambient Temperature Range Low=-40°C, Manufacturer="Texas Instruments", Manufacturer Part Number=TMP235A2DBZR, Max Supply Voltage=5.5V, Min Supply Voltage=2.3V, Operating Supply Current=9uA, Output Current=500uA, Package=DBZ0003A, Temperature="-40°C to +150°C", Accuracy=0.5%, Automotive=No, Category=IC, ComponentLink2Description=Datasheet, ComponentLink2URL=http://www.ti.com/lit/ds/symlink/tmp235.pdf, Device Class L1=Sensors, Device Class L2="Temperature and Humidity Sensors", Device Class L3=unset, Digikey Description="LOW-POWER HIGH-ACCURACY ANALOG O", Height=1.12mm, Lead Free=Yes, Max Junction Temp=+150°C, Mouser Description="±2°C Analog output temperature sensor, with 10mV /°C gain 3-SOT-23 -40 to 150", Octopart=https://octopart.com/tmp235a2dbzr-texas+instruments-94966376, RoHS=TRUE, Sensor Output="Analog Voltage", Standoff Height=0.01mm, Temperature Range High=+150°C, Temperature Range Low=-40°C
Y1: "Crystal Oscillator", LatestRevisionDate=17-Jul-2002, LatestRevisionNote="Re-released for DXP Platform.", PackageDescription="Crystal, Thru-Hole; 2 Leads; Body 3.1 x 8.2 mm (Dia.xH)", PackageReference=R38, Published=8-Jun-2000, Publisher="Altium Limited"
Y2: "25MHz Â±10ppm Crystal 10pF 50 Ohms 4-SMD, No Lead", Package="SMD-4 Abracon", Availability=Unavailable, MF=Abracon, MP=ABM3B-25.000MHZ-10-1-U-T, Price=None, SnapEDA_Link=https://www.snapeda.com/parts/ABM3B-25.000MHZ-10-1-U-T/Abracon%20LLC/view-part/425314/?ref=snap
D1 D2 D3: LatestRevisionDate=08-Jul-2005, LatestRevisionNote="Mech Layer 1 removed.", PackageDescription="LED; 2 Leads", PackageReference=LED-0, Published=8-Jun-2000, Publisher="Altium Limited"
J1: Supplier 1=Mouser
L1 L2 L3: Code_IEC=1005, Code_JEITA=0402, LatestRevisionDate=29-May-2009, LatestRevisionNote="IPC-7351 Footprint Added.", PackageDescription="Chip Inductor", PackageReference=0402-A, Published=8-Jun-2000, Publisher="Altium Limited"

## Free pads (board coordinates)
  round 130 hole 130 unplated: 5(175.5,2964.5) 6(175.5,564.5) 7(4575.5,564.5) 8(4575.5,2964.5)

## Via types
v1: diameter 30, hole 15, Top Layer to Bottom Layer, tented both sides, 207 vias
v2: diameter 18, hole 8, Top Layer to Bottom Layer, tented both sides, 131 vias
v3: diameter 18, hole 10, Top Layer to Bottom Layer, tented both sides, 5 vias

## Nets (pads, with @x,y where several pads share a name; then routed paths per layer and width w, separated by ;. In a path a pad name is that pad's centre, name@x,y a point inside that pad or via, vN(x,y) a via of type N, cw(c..) or ccw(c..) an arc to the next point about the centre after c; other vN are vias at no path point)
1V8: J1.0 R3.2 | length 522.7
  Top Layer w5: J1.0 821,3134.59 978.03,2977.56 R3.2 R3.2@980.25,2977.56
  Top Layer w10: R3.2@980.25,2977.56 R3.2@991,2988.31
3V3: C1-1.2 C1-2.2 C3-1.2 C3-2.2 C4-1.2 C4-2.2 C5.1 C6.1 C7.2 C8.2 C9.2 C10.2 C11.2 C18.1 C19.1 C21.1 C22.1 C27.2 C28.2 C30.2 C33.1 C34.2 C168.1 J1.23 P1.1 R2.2 R4-1.1 R4-2.1 R5-1.2 R5-2.2 R6.1 R8.1 R9.1 R11.1 R12.1 U1-1.3 U1-1.5 U1-1.28 U1-2.3 U1-2.5 U1-2.28 U2.7 U2.8 U2.9 U2.16 U2.26 U2.28 U2.39 U2.47 U2.51 U2.52 U2.68 U2.69 U2.79 U2.90 U2.101 U2.113 U2.122 U3.2 U3.7 U4.8 U4.12 U6.3 U25.1 | length 3612.6
  Top Layer w5: v2(960,2195) 960,2224.68 R5-1.2 ; R2.2 v2(1050,3020) ; v2(1080,2390) 1080,2373.41 1105.47,2347.94 U1-1.5 ; R4-1.1@1120,2426.65 R4-1.1 1144.61,2424.68 ; U1-1.3 1144.92,2326.12 1144.92,2424.69 ; v2(1145,2460) 1144.61,2459.61 1144.61,2424.68 ; C1-1.2@1170,2426.65 C1-1.2 1144.92,2424.69 ; U1-1.28 1228.9,2303.9 v2(1270,2345) ; C3-1.2 1317.03,2212.34 1362.34,2212.34 1365,2215 v2(1385,2195) 1385,2219.68 R5-2.2 ; 1309.69,2215 C4-1.2 ; C21.1 1516.67,1935 1526.67,1945 v2(1530,1945) 1530,1941.48 1535,1936.48 1535,1904.68 ; v2(1500,2385) 1500,2352.91 1525.47,2327.44 U1-2.5 ; R4-2.1 1565,2414.68 ; C22.1 1550,1362.5 ; R9.1 1550,1362.5 ; U1-2.3 1565,2321.2 1565,2414.68 ; v2(1565,2445) 1565,2414.68 ; v2(1585,1360) 1552.5,1360 1550,1362.5 ; C1-2.2 1565,2414.68 ; U1-2.28 1638.9,2298.9 v2(1685,2345) ; v3(1710,2165) 1729.69,2184.69 C3-2.2 ; v2(1775,1825) 1776.77,1823.23 1776.77,1789.65 ; U2.52 U2.51@1823.62,1734.59 ; U2.51 1786.14,1735.28 1776.46,1744.96 1776.46,1764.65 1776.77,1764.96 1776.77,1789.65 ; U2.47 1785.39,1798.27 1776.77,1789.65 ; U2.39 1863.65,1924.25 1868.25,1919.65 v2(1871.77,1919.65) ; v2@1926.77,1522.48 1929.92,1519.33 U2.68 ; U2.68@1930.61,1471.5 U2.69 ; U2.28 1945.67,2108.54 v2(1961.77,2124.65) ; C7.2 v2(1961.77,2124.65) ; U2.26 1977.17,2109.25 v2(1961.77,2124.65) ; R6.1 2031.77,1409.65 2037.13,1415 v2(2055,1415) 2058.52,1415 2068.08,1424.56 2096.11,1424.56 2103.15,1431.6 U2.79 ; v2(2126.77,2124.65) 2126.77,2121.13 2133.96,2113.94 2133.96,2078.48 U2.16 ; v3(2241.17,2034.65) 2241.17,2038.16 2244.88,2041.88 U2.9 ; U2.8 2260.63,2116.34 v2@2266.77,2122.48 ; C11.2 v2(2266.77,2124.65) 2276.38,2115.04 U2.7 ; U2.90 2276.38,1447.45 2298.07,1425.75 2314.25,1425.75 v2(2315,1425) 2315,1385.31 C9.2 ; v2(2381.77,1604.65) 2382.9,1604.65 2394,1593.54 U2.101 ; U2.113 2474.65,1782.52 v2(2476.77,1784.65) 2476.77,1754.96 C10.2@2477.09,1754.65 ; U2.122 2453.97,1924.25 2466.76,1937.04 2473.99,1937.04 v2(2476.48,1939.53) ; 1144.61,2424.69 1144.92,2424.69
  Top Layer w10: v2(1440,1525) U3.2 U3.2@1502.48,1534.96 ; v2(1440,1775) U3.7 U3.7@1502.48,1784.96 ; v2(1885,2780) U6.3 ; v2@1926.77,1522.48 v2(1926.77,1524.65) ; C34.2 2007.56,2956.97 2029.06,2978.47 2033.47,2978.47 v2(2035,2980) 2033.47,2981.53 2029.06,2981.53 2007.56,3003.03 C33.1 ; C6.1 v2(2050,2500) ; v2(2126.77,2124.65) v2@2126.77,2126.81 ; v2@2266.77,2122.48 v2(2266.77,2124.65) ; v2(2525,1360) C5.1 ; v2(2705,2800) 2705.16,2799.84 2744.84,2799.84 C27.2 C28.2 2790.69,2799 2864.31,2799 U4.8 U4.8@2863.22,2796.53 ; P1.1@2850.12,1495 v2(2930,1495) ; v2(2895,2525) C30.2 2928.96,2526.36 2928.96,2596.16 U4.12 ; v2(3445,1705) 3506.06,1705 U25.1 ; C168.1 v2(3645,1750)
  Bottom Layer w5: v2(1355,1615) 1355,1575.31 R12.1 ; v2(1360,1685) 1360,1688.02 1370.16,1698.18 R11.1
  Bottom Layer w10: C19.1 v2(1440,1525) ; C18.1 v2(1440,1775)
  Bottom Layer w200: 1295,3114.68 J1.23@1295,3408.75
  other v2: 1245,3055 1335,3070 1280,3090 1360,3105 1315,3120 1220,3125 1365,3145 1270,3160
5V0: J1.1 R1.2 | length 511.3
  Top Layer w5: R1.2 1126.97,2977.56 1294,3144.59 J1.1
ANT_I: C25.2 U4.4 | length 115.9
  Top Layer w10: C25.2@2755,2957.56 2756.97,2957.56 2771.1,2971.69 U4.4
ANT_O: C25.1 U4.6 | length 117.2
  Top Layer w10: C25.1@2755,2902.44 2756.97,2902.44 2774.41,2885 U4.6
CENTER1: R13.2 U3.10 | length 51.3
  Top Layer w5: R13.2 U3.10
  Top Layer w10: U3.10@1154.98,1777.5 U3.10
CENTER2: R14.2 U3.15 | length 47.8
  Top Layer w5: R14.2 U3.15
CGND: *1.9 *1.10 C23.1 C24.1 R16.1 | length 133.8
  Top Layer w5: v2(705,1250) 739.69,1250 C23.1
  Top Layer w10: v2(790,1775) R16.1 ; v2(1165,1245) C24.1
  other v1: 600,600 1100,800 600,1000 1100,1200 600,1400 800,1400 700,1600
GND: C1-1.1 C1-2.1 C2-1.1 C2-2.1 C3-1.1 C3-2.1 C4-1.1 C4-2.1 C5.2 C6.2 C7.1 C8.1 C9.1 C10.1 C11.1 C12.1 C13.1 C14.1 C15.1 C16.1 C17.1 C18.2 C19.2 C20.1 C21.2 C22.2 C24.2 C26.1 C27.1 C28.1 C29.1 C30.1 C31.1 C32.1 C33.2 C34.1 C167.2 C168.2 D1.2 D2.2 D3.2 J1.22 J1.40 J1.41 J1.42 J1.43 L1.2 P1.3 P1.5 P1.7 P1.9 R7.1 R16.2 R18.1 SW1.3 U1-1.2 U1-1.6 U1-1.15 U1-1.16 U1-1.17 U1-1.18 U1-1.25 U1-2.2 U1-2.6 U1-2.15 U1-2.16 U1-2.17 U1-2.18 U1-2.25 U2.10 U2.17 U2.48 U2.55 U2.58 U2.80 U2.114 U4.2 U4.3 U4.5 U4.7 U4.9 U4.15 U4.16 U4.17 U4.19 U4.22 U4.24 U4.25 U4.27 U6.2 U6.8 U7.3 U25.3 Y2.2 Y2.4 | length 6214.5
  Top Layer w5: C2-1.1 965.32,2280.32 v2(1010,2325) 1010.71,2324.29 1072.78,2324.29 U1-1.6 ; U1-1.15 1103.05,2146.42 U1-1.16 ; U1-1.16 U1-1.17 ; v2(1130,2090) 1130,2093.52 1125.16,2098.36 U1-1.17 ; U1-1.18 U1-1.17 ; U1-1.2 1164.53,2332.44 1170,2337.91 C1-1.1 1201.8,2385.32 1211.48,2395 v2(1215,2395) ; U1-1.25 1270.16,2244.84 C4-1.1 ; 1268.35,2215 1270.32,2216.97 C4-1.1 ; v2(1270,2275) 1270,2245.32 C4-1.1 ; C2-2.1 1385,2260.32 v2(1385,2290) 1413.58,2318.58 U1-2.6 ; v2(1410,1935) C21.2 ; U1-2.15 1523.05,2141.42 U1-2.16 ; U1-2.16 U1-2.17 ; v2(1545,2080) 1545.08,2080.08 1545.08,2138.88 U1-2.17 ; C22.2 1550.32,1290 v2(1585,1290) ; U1-2.18 U1-2.17 ; U1-2.2 1584.53,2327.44 1590,2332.91 C1-2.1 1621.8,2375.32 1626.48,2380 1629.59,2380 v2(1629.8,2380.2) ; U1-2.25 1690.16,2239.84 C3-2.1 ; v2(1690,1765) 1736.73,1765 C8.1@1737.09,1764.65 ; v2(1690,2275) 1690,2240.32 C3-2.1 ; C4-2.1@1690.32,2210 C3-2.1 ; v2(1776.77,1534.65) R7.1@1776.77,1569.96 ; U2.58 1847.67,1625.04 1875,1652.37 v3(1875,1655) 1857.72,1672.28 U2.55 ; U2.48 1862.22,1782.52 v2@1870.09,1774.65 ; C15.1 1837.03,1327.34 1844.15,1327.34 1846.46,1329.65 v2(1881.77,1329.65) 1881.77,1326.13 1872.09,1316.44 C16.1 ; v2(2086.77,1009.65) 2086.77,1058.31 SW1.3 ; v3(2107.33,2031.62) 2118.9,2054.17 U2.17 ; U2.80 2118.9,1411.1 v2(2120,1410) 2123.52,1410 2126.18,1412.66 2158.29,1412.66 C12.1 ; v2(2215.32,2124.27) 2229.13,2110.46 U2.10 ; C11.1 v2(2266.77,2234.65) ; C17.1 2280,1080.32 2280,1125 v2(2330,1175) 2385.63,1175 Y2.2 ; C9.1 2360,1379.68 v2(2360,1350) ; v2(2381.77,1789.65) 2385.29,1789.65 2393.91,1798.27 U2.114 ; v2(2500,1190) 2502.49,1192.49 2502.49,1199.14 2523.35,1220 C20.1@2525.32,1220 ; C10.1@2516.46,1754.65 2516.77,1754.33 v2(2516.77,1724.65) ; Y2.4 Y2.4@2563.86,1080 ; v2(3270,3055) 3272.49,3057.49 3302.49,3057.49 3324.69,3079.69 L1.2 L1.2@3322.72,3100 ; C168.2 3649.69,1670 v2(3680,1670)
  Top Layer w10: R16.2 v2(790,1975) ; D3.2 D2.2 ; v2(1050,2765) D2.2 ; D1.2 D2.2 ; C24.2 v2(1375,1245) ; v2@1870.09,1774.65 v2(1871.77,1774.65) ; U6.2@1930.98,2830 U6.2 v2(2000,2830) ; C34.1@1952.44,2953.03 C34.1 1952.44,2956.97 1932.04,2977.37 1929.84,2977.37 v2(1928.31,2978.9) 1952.44,3003.03 C33.2 ; C7.1 1961.93,2199.49 1996.61,2199.49 v2(1996.77,2199.65) ; v2(2050,2310) C6.2 ; U6.8 2212.84,2880 2217.84,2885 v2(2220,2885) 2262.44,2885 C31.1 ; v3(2265,2675) C32.1 ; U7.3 v2(2460,2805) ; Y2.4@2563.86,1080 v2(2620,1080) ; C5.2 v2(2715,1360) ; v2(2705,2750) v2@2707.16,2750 ; R18.1 2797.21,3060.63 2802.84,3055 v2(2805,3055) ; v2(2795,2930) 2795.89,2929.11 2864.11,2929.11 U4.5 ; P1.3@2850.12,1545 P1.7@2850.12,1645 ; P1.9@2850.12,1695 P1.7@2850.12,1645 ; U4.9 2920,2755 2930,2765 v2(2930,2800) 2930,2830 2920,2840 2865,2840 2864.15,2840.85 U4.7 U4.7@2890.59,2841.69 ; U4.3 2839.41,3015 2806.53,3047.88 2806.53,3053.47 v2(2805,3055) ; U4.2 2810.47,3058.31 2807.16,3055 v2(2805,3055) ; v2(2925,1645) P1.7@2850.12,1645 ; C30.1 v2(3020,2525) 3045,2525 3057.52,2537.52 U4.15 U4.16 U4.17 ; U4.19 3206,2710.85 3264.15,2710.85 v2(3265,2710) ; U4.22 3213.94,2850.47 3255.47,2850.47 3270,2865 v2(3270,2905) 3267.84,2905 3253.39,2919.45 3213.94,2919.45 U4.24 U4.25 ; U4.27 3264.53,3058.31 3267.84,3055 v2(3270,3055) ; v2(3295,1580) C167.2 ; C29.1 3445,2755 v2(3465,2775) 3440,2800 C26.1 ; U25.3 3591.5,1665.16 3644.84,1665.16 C168.2
  Bottom Layer w5: J1.22@750,3346.75 J1.22 ; v2(2176.77,1779.65) v2@2180.29,1779.65 ; C14.1 2209.21,1761.61 2195.96,1774.86 2185.07,1774.86 v2@2180.29,1779.65 ; C13.1 2209.21,1802.68 2195.96,1789.43 2190.07,1789.43 v2@2180.29,1779.65
  Bottom Layer w10: v2(1340,1525) C19.2 ; v2(1340,1775) C18.2
  Bottom Layer w15: J1.40 2108.5,3170.98 ; 2110,3136.5 2110,3139.2 2108.5,3140.7 2108.5,3170.98 ; J1.41 2140,3201.5 2130,3191.5 2129.02,3191.5 2108.5,3170.98 ; J1.42 2171.5,3154.71 2193.11,3133.11 ; J1.43 2203,3132 2205,3130
  Bottom Layer w200: J1.22 825,3413.75 825,3119.68
  other v1: 400,600 1400,600 1600,600 1800,600 2000,600 2200,600 2400,600 2600,600 2800,600 3000,600 3200,600 3400,600 3600,600 3800,600 4000,600 4200,600 4400,600 300,800 1500,800 1700,800 1900,800 2100,800 2300,800 2500,800 2700,800 2900,800 3100,800 3300,800 3500,800 3700,800 3900,800 4100,800 4300,800 4500,800 4700,800 200,1000 400,1000 1400,1000 1600,1000 1800,1000 2000,1000 2200,1000 2400,1000 2600,1000 2800,1000 3000,1000 3200,1000 3400,1000 3600,1000 3800,1000 4000,1000 4200,1000 4400,1000 4600,1000 300,1200 1500,1200 1700,1200 1900,1200 2100,1200 2300,1200 2700,1200 2900,1200 3100,1200 3300,1200 3500,1200 3700,1200 3900,1200 4100,1200 4300,1200 4500,1200 4700,1200 200,1400 400,1400 1400,1400 1600,1400 2800,1400 3000,1400 3200,1400 3400,1400 3600,1400 3800,1400 4000,1400 4200,1400 4400,1400 4600,1400 300,1600 1700,1600 1900,1600 2300,1600 3100,1600 3700,1600 3900,1600 4100,1600 4300,1600 4500,1600 4700,1600 200,1800 400,1800 1600,1800 2000,1800 2600,1800 2800,1800 3000,1800 3400,1800 3600,1800 3800,1800 4000,1800 4200,1800 4400,1800 4600,1800 300,2000 500,2000 700,2000 900,2000 3100,2000 3300,2000 3500,2000 3700,2000 3900,2000 4100,2000 4300,2000 4500,2000 4700,2000 200,2200 400,2200 600,2200 800,2200 2400,2200 2600,2200 2800,2200 3000,2200 3400,2200 3600,2200 3800,2200 4000,2200 4200,2200 4400,2200 4600,2200 300,2400 500,2400 700,2400 900,2400 1300,2400 2500,2400 2900,2400 3100,2400 3300,2400 3500,2400 3700,2400 3900,2400 4100,2400 4300,2400 4500,2400 4700,2400 200,2600 400,2600 600,2600 800,2600 1000,2600 1200,2600 1400,2600 1600,2600 2000,2600 2200,2600 2400,2600 2800,2600 3400,2600 3800,2600 4000,2600 4200,2600 4400,2600 4600,2600 300,2800 500,2800 700,2800 900,2800 1300,2800 1500,2800 1700,2800 2100,2800 3500,2800 3700,2800 3900,2800 4100,2800 4300,2800 4500,2800 4700,2800 400,3000 600,3000 1200,3000 1400,3000 1600,3000 1800,3000 2400,3000 2600,3000 3600,3000 3800,3000 4000,3000 4200,3000 4400,3000
INT_U_BNO0551: U1-1.14 U2.3 | length 1567.7
  Top Layer w5: v2(1011.1,2166.1) U1-1.14 ; v2(2120,2260) 2275,2260 2339.37,2195.63 2339.37,2106.13
  Bottom Layer w5: v2(1011.1,2166.1) 1219.06,2166.1 1245.56,2139.6 1884.6,2139.6 2005,2260 v2(2120,2260)
INT_U_BNO0552: U1-2.14 U2.1 | length 1360.1
  Top Layer w5: v2(1441.1,2161.1) U1-2.14 ; v2(2285,2405) 2285,2345 2370.87,2259.13 U2.1
  Bottom Layer w5: v2(1441.1,2161.1) 1685,2405 v2(2285,2405)
NetC2_U_BNO0551_2: C2-1.2 U1-1.9 | length 69
  Top Layer w5: C2-1.2@1005.16,2264.53 U1-1.9
  Top Layer w10: C2-1.2 C2-1.2@1005.16,2264.53
NetC2_U_BNO0552_2: C2-2.2 U1-2.9 | length 69
  Top Layer w5: C2-2.2@1425.16,2259.53 U1-2.9
  Top Layer w10: C2-2.2 C2-2.2@1425.16,2259.53
NetC12_2: C12.2 C13.2 C14.2 U2.87 U2.115 | length 633.6
  Top Layer w5: C12.2 2206.97,1420 2229.13,1442.17 U2.87 2229.13,1682.01 v2(2306.77,1759.65) 2361.14,1814.02 U2.115
  Bottom Layer w5: C14.2 v2(2306.77,1759.65) 2306.77,1760.24 2264.33,1802.68 C13.2
NetC15_2: C15.2 U2.66 Y1.2 | length 219.1
  Top Layer w5: C15.2 1792.28,1320 1799.63,1327.34 1799.63,1329.31 1812.56,1342.24 1812.56,1397.46 1829.74,1414.65 1866.77,1414.65 1898.43,1446.3 U2.66
NetC16_2: C16.2 U2.67 Y1.1 | length 178.4
  Top Layer w5: C16.2 1911.46,1384.17 Y1.1 1914.17,1387.83 U2.67
NetC17_2: C17.2 U2.88 Y2.3 | length 575.5
  Top Layer w5: U2.88 2244.88,1075.12 2270,1050 2310,1050 2319.69,1059.69 C17.2 2321.93,1077.76 Y2.3
NetC20_2: C20.2 R10.2 Y2.1 | length 139.2
  Top Layer w5: C20.2@2564.69,1220 2561.61,1216.93 Y2.1 2564.37,1175 2620.31,1175 2620.31,1160 2621,1159.31 2621,1157.34 2628.35,1150 R10.2
NetC23_2: C23.2 R13.1 R14.1 R15.1 R17.1 | length 869.1
  Top Layer w5: R17.1 740,1164.68 ; v2(774.69,1210.31) C23.2 740,1164.68 ; R15.1@775,1166.65 R15.1 740,1164.68 ; R14.1 v2(1070.32,1554.68) ; v2(1070.32,1745.32) R13.1
  Bottom Layer w5: v2(774.69,1210.31) 774.69,1259.06 v2(1070.32,1554.68) v2(1070.32,1745.32)
NetC26_2: C26.2 L2.2 U2.41 | length 2167
  Top Layer w5: U2.41 1925.29,1892.76 v2(1927.53,1895) ; v2(2685,2340) 2650,2375 2650,2470 2680,2500 v2(2775,2500) ; C26.2@3375,2800.31 C26.2 v2(3375.31,2835.31)
  Top Layer w10: L2.2 C26.2
  Bottom Layer w5: v2(1927.53,1895) 2237.61,2205.08 2237.61,2235.89 2342.04,2340.31 v2@2684.69,2340.31 ; v2(2775,2500) 3110.31,2835.31 v2(3375.31,2835.31)
NetC29_2: C29.2 L3.2 U2.40 | length 2087.7
  Top Layer w5: v2(1765,1915) 1768.52,1915 1775.01,1908.5 U2.40 ; v2(2684.69,2444.69) 2684.84,2444.84 2774.84,2444.84 v2(2775,2445) ; v2(3375.31,2725.31) C29.2
  Top Layer w10: L3.2 C29.2
  Bottom Layer w5: v2(1765,1915) 1836.72,1915 2366.41,2444.69 v2(2684.69,2444.69) ; v2(2775,2445) 3061.5,2731.5 3310.85,2731.5 3317.04,2725.31 v2(3375.31,2725.31)
NetC31_2: C31.2 J1.21 U6.7 U7.1 | length 839.3
  Top Layer w5: J1.21 2203,3132 2334,3001 2334,2845.06
  Top Layer w10: U6.7 2262.56,2830 2265.12,2832.56 2298.5,2832.56 2300.06,2831 2319.94,2831 2321.5,2832.56 ; 2334,2845.06 2321.5,2832.56 ; U7.1 2321.5,2832.56
NetC32_2: C32.2 J1.20 U6.6 U7.2 | length 891.1
  Top Layer w5: J1.20 2175,3414.25 2175,3135 2310,3000 v2(2310,2855)
  Top Layer w10: U6.6 2262.56,2780 C32.2 2265.12,2777.44 v2(2309.84,2777.44) U7.2
  Bottom Layer w10: v2(2309.84,2777.44) 2310,2777.6 v2(2310,2855)
NetC167_1: C167.1 R52.2 U2.121 | length 1136.9
  Top Layer w5: U2.121 3119.84,1908.5 3398.35,1630 R52.2
  Top Layer w10: C167.1 3400.31,1582.76 R52.2
NetD1_1: D1.1 R1.1 | length 69.9
  Top Layer w10: D1.1 R1.1
NetD2_1: D2.1 R2.1 | length 69.9
  Top Layer w10: D2.1 R2.1
NetD3_1: D3.1 R3.1 | length 69.9
  Top Layer w10: D3.1 R3.1
NetD4_1: D4.1 U3.16 | length 181.7
  Top Layer w5: D4.1 1055,1435 1090,1470 1152.48,1470 U3.16
NetD4_2: D4.2 U3.14 | length 338.8
  Top Layer w5: D4.2 1005,1540 1045,1580 1152.48,1580 U3.14
NetD4_3: D4.3 U3.11 | length 470.2
  Top Layer w5: D4.3 955,1580 1100,1725 U3.11
NetD4_4: D4.4 U3.9 | length 680
  Top Layer w5: D4.4@900,1377.36 D4.4 905,1770 960,1825 U3.9
NetJ1_18: J1.18 U2.95 | length 2639.9
  Top Layer w5: J1.18 2110,3416.25 v2(2110,3110) ; U2.95 2355.12,1439.88 2380,1415 v2(2695,1415)
  Bottom Layer w5: v2(2110,3110) 2710,2510 2710,1945.46 2695,1930.46 v2(2695,1415)
NetJ1_19: J1.19 U2.96 | length 2636.2
  Top Layer w5: v2(2140,3165) J1.19 ; U2.96 2370.87,1448.3 2379.17,1440 v2(2750,1440)
  Bottom Layer w5: v2(2140,3165) 2750,2555 v2(2750,1440)
NetJ1_24: J1.24 J1.25 | length 31.5
  Bottom Layer w5: J1.24 J1.25
NetL1_1: L1.1 U4.28 | length 81.1
  Top Layer w5: U4.28 3283.62,3101.69 L1.1
  Top Layer w10: U4.28 U4.28@3205.32,3101.85
NetL2_1: L2.1 U4.21 | length 85.9
  Top Layer w10: U4.21 3206,2799.15 3289.47,2799.15 L2.1
NetL3_1: L3.1 U4.20 | length 85.2
  Top Layer w10: U4.20 L3.1
NetR4_U_BNO0551_2: R4-1.2 U1-1.4 | length 61.6
  Top Layer w5: R4-1.2 1120,2356.88 1125.16,2351.72 U1-1.4 ; R4-1.2@1125,2380.31 R4-1.2@1125.16,2380.16
NetR4_U_BNO0552_2: R4-2.2 U1-2.4 | length 56.4
  Top Layer w5: R4-2.2 1545.16,2370.16 U1-2.4
NetR7_2: R7.2 U2.59 | length 46.9
  Top Layer w5: R7.2@1776.77,1609.33 1776.81,1609.29 U2.59
NetR8_2: R8.2 U2.53 U3.8 | length 432
  Top Layer w5: U3.8 U3.8@1510.04,1825 ; 1535,1865.31 1527.66,1857.97 1527.66,1842.62 U3.8@1510.04,1825 ; U2.53 1631.26,1703.78 U3.8@1510.04,1825
NetR9_2: R9.2 U2.57 U3.1 | length 475.1
  Top Layer w5: R9.2 1550,1436.65 1524.11,1462.54 1504.98,1462.54 U3.1 1510.04,1475 1675.83,1640.79 U2.57
NetR10_1: R10.1 U2.89 | length 623.7
  Top Layer w5: U2.89 2260.63,1349.37 2330,1280 2554.65,1280 2644.63,1190.02 2644.63,1175.06 2660.37,1159.31 2660.37,1157.34 2667.72,1150 R10.1
NetR11_2: R11.2 U2.54 U3.6 | length 429.4
  Top Layer w5: v2(1440,1725) U3.6 1588.83,1725 1625.79,1688.03 U2.54
  Bottom Layer w5: R11.2 v2(1440,1725)
NetR12_2: R12.2 U2.56 U3.3 | length 462.7
  Top Layer w5: v2(1435,1575) U3.3 1545,1575 1626.54,1656.54 U2.56
  Bottom Layer w5: R12.2 v2(1435,1575)
NetR18_2: R18.2 U4.1 | length 90.7
  Top Layer w10: R18.2 2775.85,3100.85 2864.15,3100.85 U4.1
NetR52_1: R52.1 U25.2 | length 70
  Top Layer w10: R52.1 3440.89,1628.8 3507.46,1628.8 U25.2
NetU2_33: U2.33 U6.4 | length 845.7
  Top Layer w5: U2.33@1822.93,2019.43 1800.64,2019.43 1800,2020.07 1800,2670 1860,2730 U6.4
NetU2_34: U2.34 U6.1 | length 1087.5
  Top Layer w5: U2.34 1792.01,2002.99 1775,2020 1775,2850 1805,2880 U6.1
  Top Layer w10: U6.1 U6.1@1964.45,2880
NetU2_125: U2.125 U4.26 | length 2081.4
  Top Layer w5: U2.125 2946.5,1971.5 3585,2610 3585,2805 3375,3015 U4.26
NetU2_126: U2.126 U4.18 | length 1278.9
  Top Layer w5: U2.126 2902.24,1987.24 3205.16,2290.16 U4.18
nRESET_U_BNO0551: R5-1.1 U1-1.11 U2.4 | length 1678.9
  Top Layer w5: R5-1.1 999.84,2225.16 U1-1.11 ; v2(1880,2015) 1880.39,2014.61 1881.85,2013.15 2107.04,2010.12 ccw(c2107.33,2031.62) 2107.65,2010.12 2313.15,2013.15 2314.61,2014.61 2323.62,2023.62 2323.62,2049.46
  Bottom Layer w5: v2(1030,2225) 959.59,2225 938.5,2203.91 938.5,2186.09 1109.59,2015 v2(1880,2015)
nRESET_U_BNO0552: R5-2.1 U1-2.11 U2.2 | length 1171.1
  Top Layer w5: R5-2.1@1424.84,2220.16 U1-2.11 1529.84,2220.16 v2(1530.2,2219.8) ; v2(2188.5,2331.5) 2253.5,2331.5 2355.12,2229.88 U2.2
  Top Layer w10: R5-2.1 R5-2.1@1424.84,2220.16
  Bottom Layer w5: v2(1530.2,2219.8) 1589.8,2219.8 1685,2315 1863.7,2315 1880.2,2331.5 v2(2188.5,2331.5)
nRST: P1.10 R6.2 SW1.2 U2.70 | length 1031
  Top Layer w5: SW1.2 1962.09,1269.69 R6.2 1961.42,1410.31 U2.70 1961.42,1506.42 1968.76,1513.76 1987.91,1513.76 1999.15,1525 v2(2000,1525) ; v2(2595,1695) P1.10
  Bottom Layer w5: v2(2000,1525) 2170,1695 v2(2595,1695)
RX+: *1.3 D4.6 | length 227.6
  Top Layer w5: *1.3 D4.6
RX-: *1.6 D4.5 | length 218.2
  Top Layer w5: *1.6@808.86,1040 *1.6 805,1145 827.64,1167.64 D4.5
RX_U_BNO0551: U1-1.19 U2.38 | length 747.3
  Top Layer w5: U1-1.19 1164.53,2137.56 1202.09,2100 1420,2100 1580,1940 U2.38
RX_U_BNO0552: U1-2.19 U2.36 | length 320
  Top Layer w5: U1-2.19 1584.53,2119.26 1732.29,1971.5 U2.36
TCK: P1.4 U2.100 | length 269.1
  Top Layer w5: U2.100 2461.04,1577.8 2473.05,1589.81 v2(2476.17,1589.81) ; v2(2600,1545) P1.4
  Bottom Layer w5: v2(2476.17,1589.81) 2476.17,1588.83 2520,1545 v2(2600,1545)
TDI: P1.8 U2.98 | length 285.8
  Top Layer w5: U2.98 2471.3,1546.3 2570,1645 P1.8
TDO: P1.6 U2.97 | length 246.1
  Top Layer w5: U2.97@2455.67,1530 2480,1530 2545,1595 P1.6
TERM1: *1.4 *1.5 R15.2 | length 376.6
  Top Layer w5: v2(740,1120) 743.52,1120 748.83,1125.31 R15.2 ; *1.5 855,990 *1.4 905,1075 v2(860,1120)
  Bottom Layer w5: v2(740,1120) v2(860,1120)
TERM2: *1.7 *1.8 R17.2 | length 206
  Top Layer w5: R17.2 *1.8 755,990 *1.7
TMS: P1.2 U2.99 | length 387.6
  Top Layer w5: v2(2375,1550) 2387.05,1562.05 U2.99 ; v2(2600,1495) P1.2
  Bottom Layer w5: v2@2375,1555 v2(2375,1550) 2430,1495 v2(2600,1495)
TX+: *1.1 D4.8 | length 227.6
  Top Layer w5: *1.1 D4.8
TX-: *1.2 D4.7 | length 127.6
  Top Layer w5: *1.2 D4.7
TX_U_BNO0551: U1-1.20 U2.37 | length 706.1
  Top Layer w5: U1-1.20 1398.58,2146.42 1589.25,1955.75 U2.37
TX_U_BNO0552: U1-2.20 U2.35 | length 295.2
  Top Layer w5: U1-2.20 1624.88,2141.42 1627.3,2139 1627.3,2097.7 1737.76,1987.24 U2.35
pads on no net: *1.11 J1.2 J1.3 J1.4 J1.5 J1.6 J1.7 J1.8 J1.9 J1.10 J1.11 J1.12 J1.13 J1.14 J1.15 J1.16 J1.17 J1.26 J1.27 J1.28 J1.29 J1.30 J1.31 J1.32 J1.33 J1.34 J1.35 J1.36 J1.37 J1.38 J1.39 SW1.1 SW1.4 U1-1.1 U1-1.7 U1-1.8 U1-1.10 U1-1.12 U1-1.13 U1-1.21 U1-1.22 U1-1.23 U1-1.24 U1-1.26 U1-1.27 U1-2.1 U1-2.7 U1-2.8 U1-2.10 U1-2.12 U1-2.13 U1-2.21 U1-2.22 U1-2.23 U1-2.24 U1-2.26 U1-2.27 U2.5 U2.6 U2.11 U2.12 U2.13 U2.14 U2.15 U2.18 U2.19 U2.20 U2.21 U2.22 U2.23 U2.24 U2.25 U2.27 U2.29 U2.30 U2.31 U2.32 U2.42 U2.43 U2.44 U2.45 U2.46 U2.49 U2.50 U2.60 U2.61 U2.62 U2.63 U2.64 U2.65 U2.71 U2.72 U2.73 U2.74 U2.75 U2.76 U2.77 U2.78 U2.81 U2.82 U2.83 U2.84 U2.85 U2.86 U2.91 U2.92 U2.93 U2.94 U2.102 U2.103 U2.104 U2.105 U2.106 U2.107 U2.108 U2.109 U2.110 U2.111 U2.112 U2.116 U2.117 U2.118 U2.119 U2.120 U2.123 U2.124 U2.127 U2.128 U3.4 U3.5 U3.12 U3.13 U4.10 U4.11 U4.13 U4.14 U4.23 U6.5

## Polygon pours and split planes (outlines as drawn)
CGND on Top Layer "CGND_L01_P002" (solid, pour order 2): 1245,390 1245,1855 520,1855 520,390
GND on Top Layer "GND_L01_P000" (solid, pour order 0): 0,3140 4750,3140 4750,390 1295,390 1295,1905 470,1905 470,390 0,390
CGND on Bottom Layer "CGND_L04_P003" (solid, pour order 3): 1245,390 1245,1855 520,1855 520,390
GND on Bottom Layer "GND_L04_P001" (solid, pour order 1): 0,3140 4750,3140 4750,390 1295,390 1295,1905 470,1905 470,390 0,390
3V3 on Layer 2 (split plane): 2223.77,3139.5 2224.15,3135.58 2225.3,3131.81 2227.16,3128.34 2229.65,3125.29 2232.7,3122.79 2236.17,3120.94 2239.94,3119.79 2243.86,3119.41 4730.4,3119.41 4730.4,409.6 1295.05,409.6 1295.08,410 1295.08,1880 1294.77,1883.92 1293.85,1887.75 1292.34,1891.38 1290.29,1894.74 1287.73,1897.73 1284.74,1900.29 1281.38,1902.34 1277.75,1903.85 1273.92,1904.77 1270,1905.08 1267.5,1904.88 1265,1905.08 500,1905.08 496.08,1904.77 492.25,1903.85 488.62,1902.34 485.26,1900.29 482.27,1897.73 479.71,1894.74 477.66,1891.38 476.15,1887.75 475.23,1883.92 474.92,1880 474.92,410 474.95,409.6 20.6,409.6 20.6,3119.41 633.87,3119.41 637.79,3119.79 641.56,3120.94 645.03,3122.79 648.08,3125.29 650.57,3128.34 652.43,3131.81 653.58,3135.58 653.96,3139.5 653.96,3619.41 1478.77,3619.41 1478.77,3139.5 1479.15,3135.58 1480.3,3131.81 1482.16,3128.34 1484.65,3125.29 1487.7,3122.79 1491.17,3120.94 1494.94,3119.79 1498.87,3119.41 1568.87,3119.41 1572.79,3119.79 1576.56,3120.94 1580.03,3122.79 1583.08,3125.29 1585.57,3128.34 1587.43,3131.81 1588.58,3135.58 1588.96,3139.5 1588.96,3619.41 2223.77,3619.41
CGND on Layer 2 (split plane): 1244.92,410 1244.95,409.6 1200.59,409.6 1200.59,468 1200.21,471.92 1199.06,475.69 1197.21,479.17 1194.71,482.21 1191.66,484.71 1188.19,486.57 1184.42,487.71 1180.5,488.1 1077.59,488.1 1077.59,604.9 1105,604.9 1108.92,605.29 1112.69,606.43 1116.16,608.29 1119.21,610.79 1121.71,613.83 1123.56,617.31 1124.71,621.08 1125.09,625 1125.09,755 1124.71,758.92 1123.56,762.69 1121.71,766.17 1119.21,769.21 1116.16,771.71 1112.69,773.57 1108.92,774.71 1105,775.1 1077.59,775.1 1077.59,879 1077.21,882.92 1076.06,886.69 1074.21,890.17 1071.71,893.21 1068.66,895.71 1065.19,897.57 1061.42,898.71 1057.5,899.1 702.5,899.1 698.58,898.71 694.81,897.57 691.33,895.71 688.29,893.21 685.79,890.17 683.93,886.69 682.79,882.92 682.4,879 682.4,775.1 655,775.1 651.08,774.71 647.31,773.57 643.83,771.71 640.79,769.21 638.29,766.17 636.43,762.69 635.29,758.92 634.9,755 634.9,625 635.29,621.08 636.43,617.31 638.29,613.83 640.79,610.79 643.83,608.29 647.31,606.43 651.08,605.29 655,604.9 682.4,604.9 682.4,488.1 579.5,488.1 575.58,487.71 571.81,486.57 568.33,484.71 565.29,482.21 562.79,479.17 560.93,475.69 559.79,471.92 559.4,468 559.4,409.6 525.05,409.6 525.08,410 525.08,1854.92 1244.92,1854.92